# Altium PCB 电眼主板.PcbDoc (part 1 of 5)
Units mm, origin at the board's own origin, x right, y up, seen from the top; angles counter-clockwise.
Board outline 180 x 100 mm, 2 copper layers (Top Layer, Bottom Layer); 210 components, 262 nets, 810 pads, 212 vias.
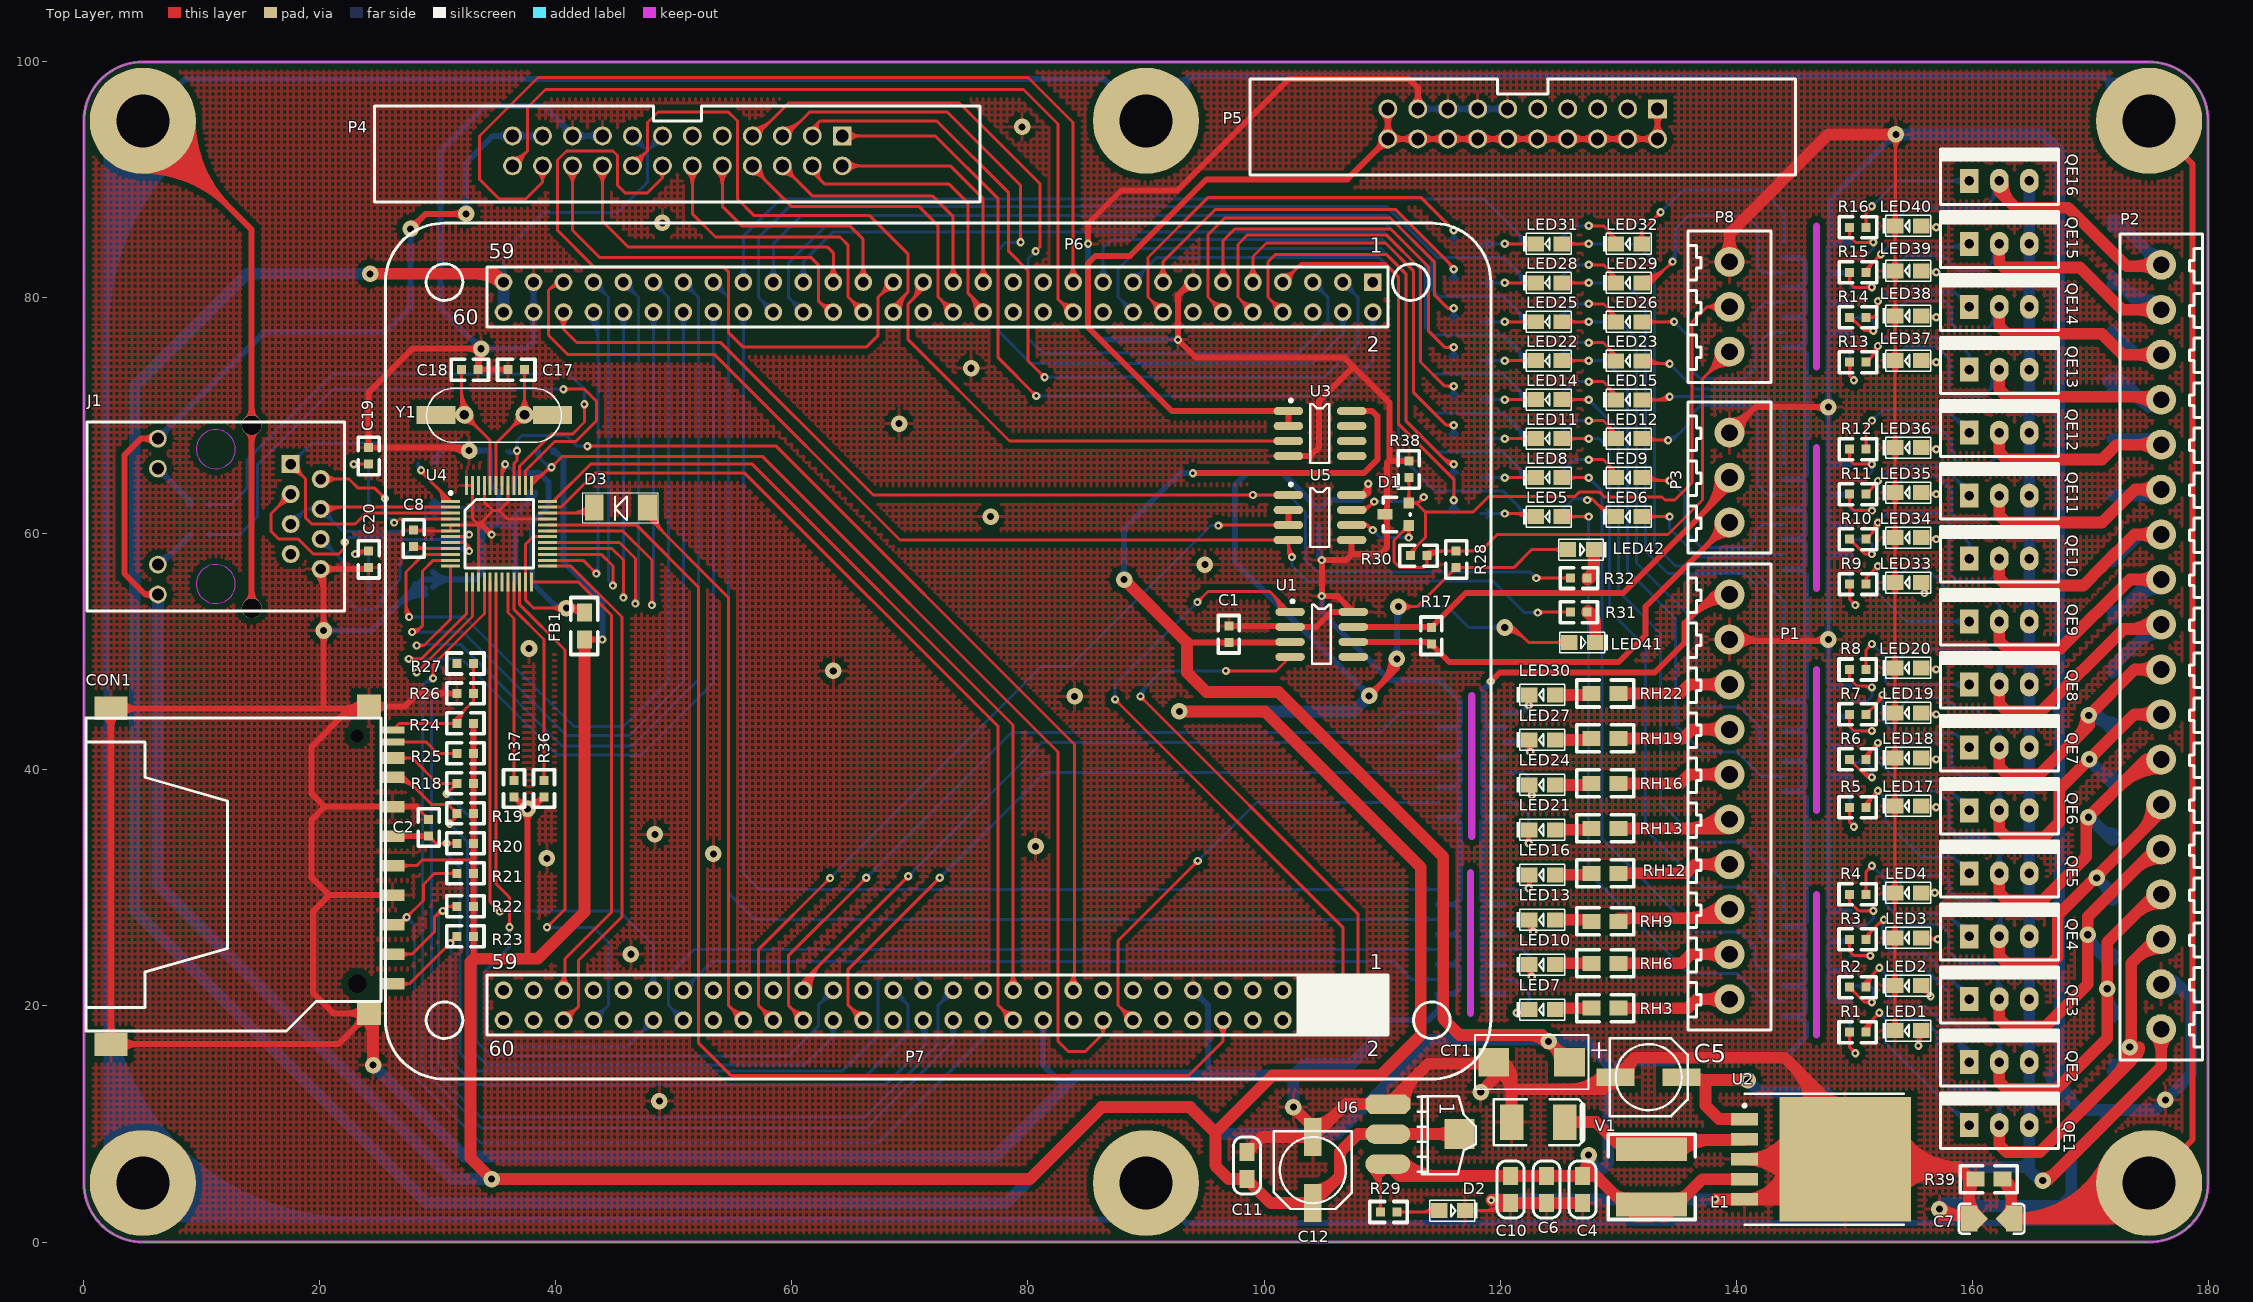
[diagram p0: Top Layer view]
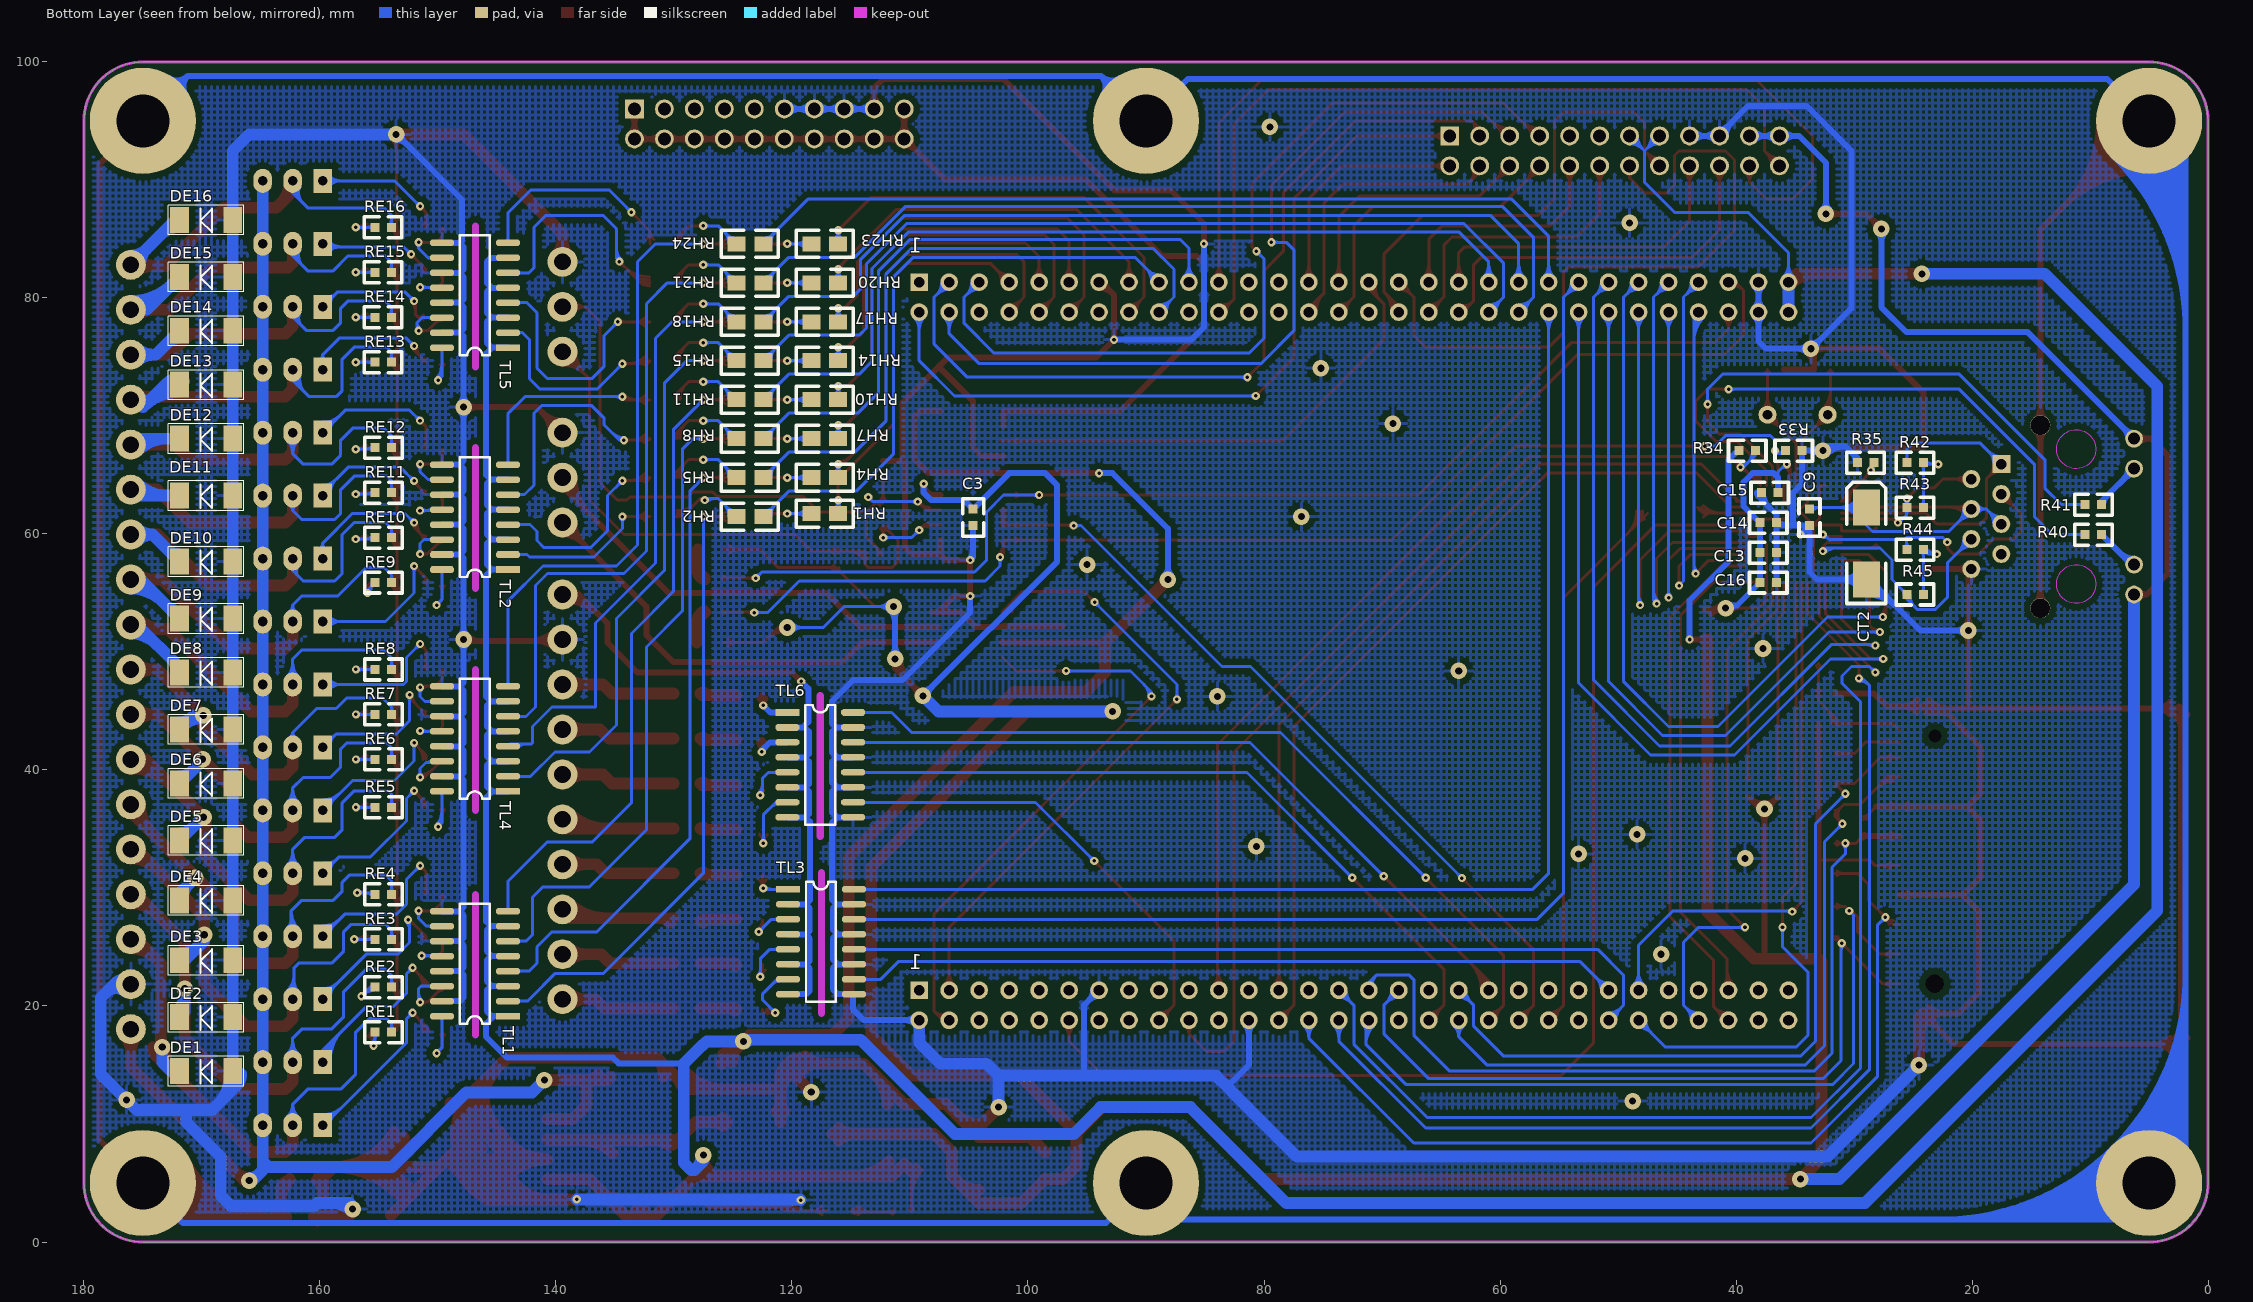
[diagram p1: Bottom Layer view, seen from below]

## Layer stack, top to bottom
Top Layer: signal copper 0.0356
Dielectric: dielectric 0.32, FR-4, Dk 4.8
Bottom Layer: signal copper 0.0356

## Board outline
0,5 ccw(c5,5) 5,0 175,0 ccw(c175,5) 180,5 180,95 ccw(c175,95) 175,100 5,100 ccw(c5,95) 0,95

## Design rules (kind name [scope] priority, off if disabled: settings)
Clearance Clearance_1 [Inpolygon] p1: gap=0.508
Clearance [All] p2: gap=0.229
HoleSize [All] p1: absolutevalues=TRUE maxlimit=5 minlimit=0.025 maxpercent=80.000 minpercent=20.000
MinimumSolderMaskSliver [All] p1: minsoldermaskwidth=0
PolygonConnect [All] p1: connectstyle=Relief reliefconductorwidth=0.254 reliefentries=4 polygonreliefangle="90 Angle"
RoutingVias [All] p1: holewidth=0.6 width=1.4 viastyle="Through Hole" minholewidth=0.3 minwidth=0.7 maxholewidth=1 maxwidth=2
SilkToSilkClearance [All] p1: silktosilkclearance=0.01
SilkscreenOverComponentPads [All] p1: minsilkscreentomaskgap=0
SolderMaskExpansion [All] p1: expansion=0.102
TestPointUsage [All] p1: valid=0 allowmultiple=FALSE
Testpoint [All] p1: side=3 testpointundercomponent=TRUE minsize=1.016 maxsize=2.54 preferedsize=1.524 minholesize=0 maxholesize=1.016 preferedholesize=0.813 testpointgrid=0.025 style=297 order=0123456789
Width [All] p1: maxlimit=1 minlimit=0.254 preferedwidth=0.254
20 further rules are at their usual default settings.

## Components (designator, comment, footprint, x,y, rotation, side; value= is the part's Value field where it differs from the comment)
C1 "电容(贴片)" 0603 97.028,50.8 r90 top
C2 "电容(贴片)" 0603 29.21,35.814 r270 top
C3 "电容(贴片)" 0603 104.648,60.706 r90 bottom
C4 "104" 0805C 127,3.302 r90 top
C5 "电解电容(贴片)" CC6.56.5 132.588,13.97 r180 top
C6 "10uF" 0805C 123.952,5.588 r270 top
C7 "102/2KV" 0805CC 163.322,2.032 r180 top
C8 "电容(贴片)" 0603 27.94,58.928 r90 top
C9 "电容(贴片)" 0603 33.782,60.706 r90 bottom
C10 "104" 0805C 120.904,3.302 r90 top
C11 "104" 0805C 98.552,7.62 r270 top
C12 "电解电容(贴片)" CC6.56.5 104.14,6.096 r90 top
C13 "电容(贴片)" 0603 36.576,58.42 r0 bottom
C14 "电容(贴片)" 0603 36.576,60.96 r0 bottom
C15 "电容(贴片)" 0603 37.846,63.5 r180 bottom
C16 "电容(贴片)" 0603 36.576,55.88 r0 bottom
C17 "贴片电容 22p" 0603 37.338,73.914 r180 top
C18 "贴片电容 22p" 0603 32.004,73.914 r0 top
C19 "电容(贴片)" 0603 24.13,67.31 r270 top
C20 "电容(贴片)" 0603 24.13,57.15 r90 top
CON1 "SD卡座" SDCARD 26.162,24.384 r180 top
CT1 "钽电容" CT7343 122.682,15.24 r180 top
CT2 "钽电容(贴片)" 6032 28.956,62.23 r90 bottom
D1 "PSM712" SOT-23 112.268,60.706 r90 top
D2 "17-215-SURC-S530-A3-TR8" LED-0805 114.808,2.54 r0 top
D3 "二极管(贴片)" D1206 47.752,62.23 r180 top
DE1 "二极管(贴片)" D1206 167.386,14.478 r0 bottom
DE2 "二极管(贴片)" D1206 167.386,19.05 r0 bottom
DE3 "二极管(贴片)" D1206 167.386,23.876 r0 bottom
DE4 "二极管(贴片)" D1206 167.386,28.956 r0 bottom
DE5 "二极管(贴片)" D1206 167.386,34.036 r0 bottom
DE6 "二极管(贴片)" D1206 167.386,38.862 r0 bottom
DE7 "二极管(贴片)" D1206 167.386,43.434 r0 bottom
DE8 "二极管(贴片)" D1206 167.386,48.26 r0 bottom
DE9 "二极管(贴片)" D1206 167.386,52.832 r0 bottom
DE10 "二极管(贴片)" D1206 167.386,57.658 r0 bottom
DE11 "二极管(贴片)" D1206 167.386,63.246 r0 bottom
DE12 "二极管(贴片)" D1206 167.386,68.072 r0 bottom
DE13 "二极管(贴片)" D1206 167.386,72.644 r0 bottom
DE14 "二极管(贴片)" D1206 167.386,77.216 r0 bottom
DE15 "二极管(贴片)" D1206 167.386,81.788 r0 bottom
DE16 "二极管(贴片)" D1206 167.386,86.614 r0 bottom
FB1 "220R 2A" 0805 42.418,53.34 r270 top
J1 "RJ45" HR911105A 11.176,61.468 r90 top
L1 "电感(贴片)" 6045 132.842,7.874 r270 top
LED1 "二极管(贴片发光绿色)" LED-0805 155.702,18.034 r180 top
LED2 "二极管(贴片发光绿色)" LED-0805 155.702,21.844 r180 top
LED3 "二极管(贴片发光绿色)" LED-0805 155.702,25.908 r180 top
LED4 "二极管(贴片发光绿色)" LED-0805 155.702,29.718 r180 top
LED5 "二极管(贴片发光绿色)" LED-0805 125.247,61.595 r180 top
LED6 "二极管(贴片发光绿色)" LED-0805 132.046,61.589 r180 top
LED7 "二极管(贴片发光绿色)" LED-0805 124.714,19.812 r180 top
LED8 "二极管(贴片发光绿色)" LED-0805 125.247,64.897 r180 top
LED9 "二极管(贴片发光绿色)" LED-0805 132.046,64.891 r180 top
LED10 "二极管(贴片发光绿色)" LED-0805 124.714,23.622 r180 top
LED11 "二极管(贴片发光绿色)" LED-0805 125.247,68.199 r180 top
LED12 "二极管(贴片发光绿色)" LED-0805 132.046,68.193 r180 top
LED13 "二极管(贴片发光绿色)" LED-0805 124.714,27.432 r180 top
LED14 "二极管(贴片发光绿色)" LED-0805 125.247,71.501 r180 top
LED15 "二极管(贴片发光绿色)" LED-0805 132.046,71.495 r180 top
LED16 "二极管(贴片发光绿色)" LED-0805 124.714,31.242 r180 top
LED17 "二极管(贴片发光绿色)" LED-0805 155.702,37.084 r180 top
LED18 "二极管(贴片发光绿色)" LED-0805 155.702,41.148 r180 top
LED19 "二极管(贴片发光绿色)" LED-0805 155.702,44.958 r180 top
LED20 "二极管(贴片发光绿色)" LED-0805 155.702,48.768 r180 top
LED21 "二极管(贴片发光绿色)" LED-0805 124.714,35.052 r180 top
LED22 "二极管(贴片发光绿色)" LED-0805 125.247,74.803 r180 top
LED23 "二极管(贴片发光绿色)" LED-0805 132.046,74.797 r180 top
LED24 "二极管(贴片发光绿色)" LED-0805 124.714,38.862 r180 top
LED25 "二极管(贴片发光绿色)" LED-0805 125.247,78.105 r180 top
LED26 "二极管(贴片发光绿色)" LED-0805 132.046,78.099 r180 top
LED27 "二极管(贴片发光绿色)" LED-0805 124.714,42.672 r180 top
LED28 "二极管(贴片发光绿色)" LED-0805 125.247,81.407 r180 top
LED29 "二极管(贴片发光绿色)" LED-0805 132.046,81.401 r180 top
LED30 "二极管(贴片发光绿色)" LED-0805 124.714,46.482 r180 top
LED31 "二极管(贴片发光绿色)" LED-0805 125.247,84.709 r180 top
LED32 "二极管(贴片发光绿色)" LED-0805 132.046,84.703 r180 top
LED33 "二极管(贴片发光绿色)" LED-0805 155.727,56.007 r180 top
LED34 "二极管(贴片发光绿色)" LED-0805 155.727,59.817 r180 top
LED35 "二极管(贴片发光绿色)" LED-0805 155.727,63.627 r180 top
LED36 "二极管(贴片发光绿色)" LED-0805 155.727,67.437 r180 top
LED37 "二极管(贴片发光绿色)" LED-0805 155.727,74.803 r180 top
LED38 "二极管(贴片发光绿色)" LED-0805 155.727,78.613 r180 top
LED39 "二极管(贴片发光绿色)" LED-0805 155.727,82.423 r180 top
LED40 "二极管(贴片发光绿色)" LED-0805 155.727,86.233 r180 top
LED41 "二极管(贴片发光绿色)" LED-0805 125.832,50.673 r0 top
LED42 "二极管(贴片发光绿色)" LED-0805 125.73,58.547 r0 top
P1 "Header 10" CON10 139.446,20.574 r0 top
P2 "Header 18" CON18 176.022,82.804 r180 top
P3 "Header 3" CON3 139.446,60.96 r0 top
P4 "牛角插座" niujiaocha24P 64.262,93.726 r180 top
P5 "牛角插座" niujiaocha20p 133.35,96.012 r180 top
P6 "Header 30X2" HDR2X30 109.22,81.336 r180 top
P7 "Header 30X2" HDR2X30 109.22,21.336 r180 top
P8 "Header 3" CON3 139.446,75.438 r0 top
QE1 "三极管(直插)" TIP127 162.306,9.906 r0 top
QE2 "三极管(直插)" TIP127 162.306,15.24 r0 top
QE3 "三极管(直插)" TIP127 162.306,20.574 r0 top
QE4 "三极管(直插)" TIP127 162.306,25.908 r0 top
QE5 "三极管(直插)" TIP127 162.306,31.242 r0 top
QE6 "三极管(直插)" TIP127 162.306,36.576 r0 top
QE7 "三极管(直插)" TIP127 162.306,41.91 r0 top
QE8 "三极管(直插)" TIP127 162.306,47.244 r0 top
QE9 "三极管(直插)" TIP127 162.306,52.578 r0 top
QE10 "三极管(直插)" TIP127 162.306,57.912 r0 top
QE11 "三极管(直插)" TIP127 162.306,63.246 r0 top
QE12 "三极管(直插)" TIP127 162.306,68.58 r0 top
QE13 "三极管(直插)" TIP127 162.306,73.914 r0 top
QE14 "三极管(直插)" TIP127 162.306,79.248 r0 top
QE15 "三极管(直插)" TIP127 162.306,84.582 r0 top
QE16 "三极管(直插)" TIP127 162.306,89.916 r0 top
R1 "电阻(贴片)" 0603 149.606,17.78 r0 top
R2 "电阻(贴片)" 0603 149.606,21.59 r0 top
R3 "电阻(贴片)" 0603 149.606,25.654 r0 top
R4 "电阻(贴片)" 0603 149.606,29.464 r0 top
R5 "电阻(贴片)" 0603 149.606,36.83 r0 top
R6 "电阻(贴片)" 0603 149.606,40.894 r0 top
R7 "电阻(贴片)" 0603 149.606,44.704 r0 top
R8 "电阻(贴片)" 0603 149.606,48.514 r0 top
R9 "电阻(贴片)" 0603 149.631,55.753 r0 top
R10 "电阻(贴片)" 0603 149.631,59.563 r0 top
R11 "电阻(贴片)" 0603 149.631,63.373 r0 top
R12 "电阻(贴片)" 0603 149.631,67.183 r0 top
R13 "电阻(贴片)" 0603 149.631,74.549 r0 top
R14 "电阻(贴片)" 0603 149.631,78.359 r0 top
R15 "电阻(贴片)" 0603 149.631,82.169 r0 top
R16 "电阻(贴片)" 0603 149.631,85.979 r0 top
R17 "电阻(贴片)" 0603 114.186,52.07 r270 top
R18 "电阻(贴片)" 0603 33.02,38.862 r180 top
R19 "电阻(贴片)" 0603 33.02,36.322 r180 top
R20 "电阻(贴片)" 0603 33.02,33.782 r180 top
R21 "电阻(贴片)" 0603 33.02,31.242 r180 top
R22 "电阻(贴片)" 0603 33.02,28.448 r180 top
R23 "电阻(贴片)" 0603 33.02,25.908 r180 top
R24 "电阻(贴片)" 0603 33.02,43.942 r180 top
R25 "电阻(贴片)" 0603 33.02,41.402 r180 top
R26 "电阻(贴片)" 0603 33.02,46.482 r180 top
R27 "电阻(贴片)" 0603 33.02,49.022 r180 top
R28 "电阻(贴片)" 0603 116.275,58.54 r270 top
R29 "2K" 0603 111.252,2.54 r180 top
R30 "电阻(贴片)" 0603 113.792,58.166 r180 top
R31 "电阻(贴片)" 0603 125.974,53.371 r0 top
R32 "电阻(贴片)" 0603 125.984,56.261 r0 top
R33 "电阻(贴片)" 0603 35.814,67.056 r180 bottom
R34 "电阻(贴片)" 0603 38.354,67.056 r0 bottom
R35 "电阻(贴片)" 0603 29.718,66.04 r180 bottom
R36 "电阻(贴片)" 0603 38.989,37.719 r90 top
R37 "电阻(贴片)" 0603 36.449,37.719 r90 top
R38 "电阻(贴片)" 0603 112.268,64.77 r90 top
R39 "1M" 0805R 160.274,5.334 r0 top
R40 "电阻(贴片)" 0603 10.414,59.944 r180 bottom
R41 "电阻(贴片)" 0603 10.414,62.484 r180 bottom
R42 "电阻(贴片)" 0603 24.13,66.04 r0 bottom
R43 "电阻(贴片)" 0603 24.13,62.23 r0 bottom
R44 "电阻(贴片)" 0603 24.13,58.674 r0 bottom
R45 "电阻(贴片)" 0603 24.13,54.864 r0 bottom
RE1 "电阻(贴片)" 0603 153.924,17.78 r0 bottom
RE2 "电阻(贴片)" 0603 153.924,21.59 r0 bottom
RE3 "电阻(贴片)" 0603 153.924,25.654 r0 bottom
RE4 "电阻(贴片)" 0603 153.924,29.464 r0 bottom
RE5 "电阻(贴片)" 0603 153.924,36.83 r0 bottom
RE6 "电阻(贴片)" 0603 153.924,40.894 r0 bottom
RE7 "电阻(贴片)" 0603 153.924,44.704 r0 bottom
RE8 "电阻(贴片)" 0603 153.924,48.514 r0 bottom
RE9 "电阻(贴片)" 0603 153.924,55.88 r0 bottom
RE10 "电阻(贴片)" 0603 153.924,59.69 r0 bottom
RE11 "电阻(贴片)" 0603 153.924,63.5 r0 bottom
RE12 "电阻(贴片)" 0603 153.924,67.31 r0 bottom
RE13 "电阻(贴片)" 0603 153.949,74.549 r0 bottom
RE14 "电阻(贴片)" 0603 153.949,78.359 r0 bottom
RE15 "电阻(贴片)" 0603 153.949,82.169 r0 bottom
RE16 "电阻(贴片)" 0603 153.949,85.979 r0 bottom
RH1 "电阻(贴片)" 0805 118.364,61.722 r180 bottom
RH2 "电阻(贴片)" 0805 124.714,61.468 r180 bottom
RH3 "电阻(贴片)" 0805 127.762,19.812 r0 top
RH4 "电阻(贴片)" 0805 118.364,64.77 r180 bottom
RH5 "电阻(贴片)" 0805 124.714,64.768 r180 bottom
RH6 "电阻(贴片)" 0805 127.762,23.622 r0 top
RH7 "电阻(贴片)" 0805 118.364,68.072 r180 bottom
RH8 "电阻(贴片)" 0805 124.714,68.072 r180 bottom
RH9 "电阻(贴片)" 0805 127.762,27.178 r0 top
RH10 "电阻(贴片)" 0805 118.364,71.374 r180 bottom
RH11 "电阻(贴片)" 0805 124.714,71.374 r180 bottom
RH12 "电阻(贴片)" 0805 127.762,31.24 r0 top
RH13 "电阻(贴片)" 0805 127.762,35.052 r0 top
RH14 "电阻(贴片)" 0805 118.364,74.676 r180 bottom
RH15 "电阻(贴片)" 0805 124.714,74.676 r180 bottom
RH16 "电阻(贴片)" 0805 127.762,38.862 r0 top
RH17 "电阻(贴片)" 0805 118.364,77.978 r180 bottom
RH18 "电阻(贴片)" 0805 124.714,77.978 r180 bottom
RH19 "电阻(贴片)" 0805 127.762,42.672 r0 top
RH20 "电阻(贴片)" 0805 118.364,81.28 r180 bottom
RH21 "电阻(贴片)" 0805 124.714,81.28 r180 bottom
RH22 "电阻(贴片)" 0805 127.762,46.482 r0 top
RH23 "电阻(贴片)" 0805 118.364,84.582 r180 bottom
RH24 "电阻(贴片)" 0805 124.714,84.582 r180 bottom
TL1 "光耦(贴片)" SOP16 146.812,23.114 r90 bottom
TL2 "光耦(贴片)" SOP16 146.812,60.96 r90 bottom
TL3 "光耦(贴片)" SOP16 117.602,25.908 r270 bottom
TL4 "光耦(贴片)" SOP16 146.812,42.164 r90 bottom
TL5 "光耦(贴片)" SOP16 146.812,79.756 r90 bottom
TL6 "光耦(贴片)" SOP16 117.661,40.894 r270 bottom
U1 "集成电路" sop8 102.248,53.34 r0 top
U2 "LM2596S-5.0" TO-263 140.716,10.414 r270 top
U3 "集成电路" sop8 102.108,70.358 r0 top
U4 "DM9000" mTQFP48 35.306,61.468 r0 top
U5 "集成电路" sop8 102.108,63.246 r0 top
U6 "AMS1117-3.3" AMS1117 110.49,11.684 r270 top
V1 "SK210B" 1812DT 125.476,10.16 r180 top
Y1 "晶体(贴片)" CRYSTAL_SMD 37.338,70.104 r90 top

## Footprints (in the part's own frame and the unit in brackets; to place one, negate y for a bottom-side part, rotate by r counter-clockwise, add the part's x,y. Pads: shape width x height; smd on the part's side, far side on the other; paste and mask are expansions set on the pad)
0603 [mil]
  rect 30x30 smd: 1(0,0) 2(55,0)
  silkscreen extent -35,-35 90,35
0805 [mil]
  rect 60x50 smd: 1(0,-0.06) 2(90,-0.06)
  silkscreen extent -50,-45 140,45
0805C [mil]
  rect 60x50 smd: 1(0,0) 2(90,0)
  silkscreen extent -50,-45 140,45
0805CC [mil]
  rect 56x86.61 smd mask+0: 1(-10,2) 2(141,2)
  rect 56x56 smd rot 45 mask+0: 1(13,2) 2(117,2)
  silkscreen extent -44,-48 175,52
0805R [mil]
  rect 60x50 smd: 1(0,0) 2(90,0)
  silkscreen extent -50,-45 140,45
1812DT [mm]
  rect 2x3 smd: 1(4.496,0) 2(0,0)
  silkscreen extent -1.63,-1.95 5.99,1.97
6032 [mil]
  rect 120x90 smd: 1(0,0) 2(-240,0)
  silkscreen extent -320,-65 85,65
6045 [mm]
  rect 2x6 smd: 1(0,0) 2(4.699,0)
  silkscreen extent -1.27,-3.68 5.97,3.68
AMS1117 [mil]
  oct 65x150 smd: 1(0.03,-0.06)
  oval 65x150 smd: 2(100.03,-0.06) 3(200.03,-0.06)
  rect 100x100 smd: 4(100.03,239.94)
  silkscreen extent -26,100 234,293
CC6.56.5 [mm]
  rect 3.2x1.5 smd: 1(-2.794,0) 2(2.8,0)
  silkscreen extent -3.3,-3.3 3.3,3.3
CON3 [mil]
  round 100 hole 56: 1(0,0) 2(0,150) 3(0,300)
  silkscreen extent -138,-102 138,402
CON10 [mil]
  round 100 hole 56: 1(0,0) 2(0,150) 3(0,300) 4(0,450) 5(0,600) 6(0,750) 7(0,900) 8(0,1050) 9(0,1200) 10(0,1350)
  silkscreen extent -138,-102 138,1452
CON18 [mil]
  round 100 hole 56: 1(0,0) 2(0,150) 3(0,300) 4(0,450) 5(0,600) 6(0,750) 7(0,900) 8(0,1050) 9(0,1200) 10(0,1350) 11(0,1500) 12(0,1650) 13(0,1800) 14(0,1950) 15(0,2100) 16(0,2250) 17(0,2400) 18(0,2550)
  silkscreen extent -138,-102 138,2652
CRYSTAL_SMD [mil]
  rect 60x130 smd: 1(-0.46,-93.11) 2(-0.46,294.61)
  round 60 hole 32: 1(0,0) 2(-0.42,200.43)
  silkscreen extent -93,-123 88,327
CT7343 [mil] "CT7343"
  rect 102x95 smd: 1(-126,0) 2(126,0)
  silkscreen extent -250,-91 190,91
D1206 [mm]
  rect 1.6x2.2 smd: 1(0,0) 2(4.5,0)
  silkscreen extent -0.91,-1.24 5.46,1.27
HDR2X30 [mm] "Connector; Header; 30x2 Position"
  rect 1.5x1.5 hole 0.9: 1(0,0)
  round 1.5 hole 0.9: 2(0,2.54) 3(2.54,0) 4(2.54,2.54) 5(5.08,0) 6(5.08,2.54) 7(7.62,0) 8(7.62,2.54) 9(10.16,0) 10(10.16,2.54) 11(12.7,0) 12(12.7,2.54) 13(15.24,0) 14(15.24,2.54) 15(17.78,0) 16(17.78,2.54) 17(20.32,0) 18(20.32,2.54) 19(22.86,0) 20(22.86,2.54) 21(25.4,0) 22(25.4,2.54) 23(27.94,0) 24(27.94,2.54) 25(30.48,0) 26(30.48,2.54) 27(33.02,0) 28(33.02,2.54) 29(35.56,0) 30(35.56,2.54) 31(38.1,0) 32(38.1,2.54) 33(40.64,0) 34(40.64,2.54) 35(43.18,0) 36(43.18,2.54) 37(45.72,0) 38(45.72,2.54) 39(48.26,0) 40(48.26,2.54) 41(50.8,0) 42(50.8,2.54) 43(53.34,0) 44(53.34,2.54) 45(55.88,0) 46(55.88,2.54) 47(58.42,0) 48(58.42,2.54) 49(60.96,0) 50(60.96,2.54) 51(63.5,0) 52(63.5,2.54) 53(66.04,0) 54(66.04,2.54) 55(68.58,0) 56(68.58,2.54) 57(71.12,0) 58(71.12,2.54) 59(73.66,0) 60(73.66,2.54)
  silkscreen extent -1.27,-1.27 75.06,3.81
HR911105A [mm]
  rect 1.524x1.524 hole 0.889: 1(4.45,-6.35)
  round 1.524 hole 0.889: 2(3.18,-8.89) 3(1.91,-6.35) 4(0.64,-8.89) 5(-0.63,-6.35) 6(-1.9,-8.89) 7(-3.17,-6.35) 8(-4.44,-8.89)
  round 1.5 hole 1.02: 9(6.6,4.9) 10(4.064,4.9) 11(-4.064,4.9) 12(-6.6,4.9)
  round 1.7 hole 1.65: 13(7.75,-3.048) 14(-7.75,-3.048)
  Keep-Out Layer circle w0.051: c5.716,0 r1.65
  Keep-Out Layer circle w0.051: c-5.714,0 r1.65
  silkscreen extent -8,-10.92 8,10.92
LED-0805 [mil]
  rect 55.12x50 smd: 1(0.99,5) 2(88,5)
  silkscreen extent -31,-30 130,40
mTQFP48 [mm]
  rect 1.6x0.254 smd: 1(-4.223,1.3) 2(-4.223,0.8) 3(-4.223,0.3) 4(-4.223,-0.2) 5(-4.223,-0.7) 6(-4.223,-1.2) 7(-4.223,-1.7) 8(-4.223,-2.2) 9(-4.223,-2.7) 10(-4.223,-3.2) 11(-4.223,-3.7) 12(-4.223,-4.2) 25(3.977,-4.2) 26(3.977,-3.7) 27(3.977,-3.2) 28(3.977,-2.7) 29(3.977,-2.2) 30(3.977,-1.7) 31(3.977,-1.2) 32(3.977,-0.7) 33(3.977,-0.2) 34(3.977,0.3) 35(3.977,0.8) 36(3.977,1.3)
  rect 0.254x1.6 smd: 13(-2.873,-5.55) 14(-2.373,-5.55) 15(-1.873,-5.55) 16(-1.373,-5.55) 17(-0.873,-5.55) 18(-0.373,-5.55) 19(0.127,-5.55) 20(0.627,-5.55) 21(1.127,-5.55) 22(1.627,-5.55) 23(2.127,-5.55) 24(2.627,-5.55) 37(2.627,2.65) 38(2.127,2.65) 39(1.627,2.65) 40(1.127,2.65) 41(0.627,2.65) 42(0.127,2.65) 43(-0.373,2.65) 44(-0.873,2.65) 45(-1.373,2.65) 46(-1.873,2.65) 47(-2.373,2.65) 48(-2.873,2.65)
  silkscreen extent -4.35,-4.35 2.78,2.12
niujiaocha20p [mm]
  rect 1.6x1.6 hole 1.1: 1(0,0)
  round 1.6 hole 1.1: 2(0,2.54) 3(2.54,0) 4(2.54,2.54) 5(5.08,0) 6(5.08,2.54) 7(7.62,0) 8(7.62,2.54) 9(10.16,0) 10(10.16,2.54) 11(12.7,0) 12(12.7,2.54) 13(15.24,0) 14(15.24,2.54) 15(17.78,0) 16(17.78,2.54) 17(20.32,0) 18(20.32,2.54) 19(22.86,0) 20(22.86,2.54)
  silkscreen extent -11.68,-2.54 34.54,5.59
niujiaocha24P [mm]
  rect 1.6x1.6 hole 1.1: 1(0,0)
  round 1.6 hole 1.1: 2(0,2.54) 3(2.54,0) 4(2.54,2.54) 5(5.08,0) 6(5.08,2.54) 7(7.62,0) 8(7.62,2.54) 9(10.16,0) 10(10.16,2.54) 11(12.7,0) 12(12.7,2.54) 13(15.24,0) 14(15.24,2.54) 15(17.78,0) 16(17.78,2.54) 17(20.32,0) 18(20.32,2.54) 19(22.86,0) 20(22.86,2.54) 21(25.4,0) 22(25.4,2.54) 23(27.94,0) 24(27.94,2.54)
  silkscreen extent -11.68,-2.54 39.62,5.59
SDCARD [mm]
  rect 2x1 smd: 1(0,0) 2(0,-2.5) 3(0,-5) 4(0,-7.5) 5(0,-10) 6(0,-12.5) 7(0,-15) 8(0,-16.625) 9(0,2.5)
  rect 2x0.6 smd: 10(0,-19) 11(0,-18)
  rect 2x2 smd: 12(2,5) 13(2,-21)
  rect 2.8x2 smd: 14(23.876,-20.828) 15(23.876,7.62)
  round 1.5 hole 1.6: 16(3,2.5)
  round 1 hole 1.1: 17(3,-18.5)
  silkscreen extent 1,-20 26,6.5
sop8 [mm]
  oval 2.5x0.7 smd: 1(-0.037,0.051) 2(-0.037,-1.219) 3(-0.037,-2.489) 4(-0.037,-3.759) 5(5.32,-3.759) 6(5.32,-2.489) 7(5.32,-1.219) 8(5.32,0.051)
  silkscreen extent 0.04,-4.35 3.42,1.08
SOP16 [mil]
  rect 22x80 smd: 1(-156.57,-107.68)
  oct 22x80 smd: 2(-106.57,-107.68) 3(-56.57,-107.68) 4(-6.57,-107.68) 5(43.43,-107.68) 6(93.43,-107.68) 7(143.43,-107.68) 8(193.43,-107.68) 9(193.43,112.32) 10(143.43,112.32) 11(93.43,112.32) 12(43.43,112.32) 13(-6.57,112.32) 14(-56.57,112.32) 15(-106.57,112.32) 16(-156.57,112.32)
  silkscreen extent -182,-48 218,52
SOT-23 [mil]
  rect 36x36 smd: 1(0,0) 2(75,0)
  rect 36x50 smd: 3(38,80)
  silkscreen extent -20,-5 95,85
TIP127 [mil]
  rect 62x80 hole 32: 1(-100,0)
  oval 62x80 hole 32: 2(0,0) 3(100,0)
  silkscreen extent -197,-79 197,107
TO-263 [mil]
  rect 42x90 smd: 1(0,0) 2(66.93,0) 3(133.86,0) 4(200.79,0) 5(267.72,0)
  rect 414x440 smd: 6(133.86,336)
  silkscreen extent -85,-5 352,531

## Part data
C1 C3 C8 C9 C13 C14 C15 C16 C19 C20: library part "CAP_0.1uF X7R 0603", "0603X7R104J160NT(0.1uF)"
C2: library part "CAP_22pF COG 0603", "0603COG220J500NT(22pF)"
C4 C5 C7 C10 C11 C12: library part CAP
C6: library part Pro92D1.TMP_105_9, "片状电容"
C17: library part Cap, "Capacitor 0.1uf"
C18: library part Cap, "Capacitor 10uf"
CON1: library part SD-CARD, "SD/MMC CARD 26mm*25mm"
CT1: library part "CAP POL"
CT2: library part "CAP TAN 100uF/10V/6032", "100uF/10V/6032封装"
D1: library part Component_1
D2: library part LED
D3: library part "DIODE 1N4148/1206", "1N4148/1206"
DE1 DE2 DE3 DE4 DE5 DE6 DE7 DE8 DE9 DE10 DE11 DE12 DE13 DE14 DE15 DE16: library part "DIODE 1N5822/SS34", "1N5822/SS34/SMA 肖特基"
FB1: library part FERRITE, "220R,2.0A,0.05DCR"
J1: library part HR911105
L1: library part Inductor, "Inductor"
LED1 LED2 LED3 LED4 LED5 LED6 LED7 LED8 LED9 LED10 LED11 LED12 LED13 LED14 LED15 LED16 LED17 LED18 LED19 LED20 LED21 LED22 LED23 LED24 LED25 LED26 LED27 LED28 LED29 LED30 LED31 LED32 LED33 LED34 LED35 LED36 LED37 LED38 LED39 LED40 LED41 LED42: library part "LED_GREEN 0805", "LED-0805"
P1: "Header, 10-Pin"
P2: "Header, 18-Pin"
P3 P8: "Header, 3-Pin"
P4: library part "Header 12X2", "Header, 12-Pin, Dual row"
P5: library part "Header 10X2", "Header, 10-Pin, Dual row"
P6 P7: "Header, 30-Pin, Dual row"
QE1 QE2 QE3 QE4 QE5 QE6 QE7 QE8 QE9 QE10 QE11 QE12 QE13 QE14 QE15 QE16: library part TIP127
R1 R2 R3 R4 R5 R6 R7 R8 R9 R10 R11 R12 R13 R14 R15 R16 R18 R19 R20 R21 R22 R23 R24 R25 R33 R34 R35 R36 R37: library part "RES_10K 5% 0603", "RS-03K-103±5%(10KΩ)"
R17 R28 R30 R31 R32 R38: library part "RES_1K  5% 0603", "RS-03K-102±5%(1KΩ)"
R26 R27: library part "RES_0Ω 5% 0603", "RS-03K-000±5%(0Ω)"
R29: library part RESISTOR_Dup1
R39: library part Res2, "Resistor"
R40 R41 R42 R43 R44 R45: library part "RES_10K 5% 0603", "RS-03K-49.9±5%(49.9Ω)"
RE1 RE2 RE3 RE4 RE5 RE6 RE7 RE8 RE9 RE10 RE11 RE12 RE13 RE14 RE15 RE16: library part "RES_5.1K 5% 0805", "RS-05K-512±5%(5.1KΩ 5%)"
RH1 RH2 RH4 RH5 RH7 RH8 RH10 RH11 RH14 RH15 RH17 RH18 RH20 RH21 RH23 RH24: library part "RES_200Ω5% 0805", "RS-05K-201±5%(200Ω)"
RH3 RH6 RH9 RH12 RH13 RH16 RH19 RH22: library part "RES_200Ω5% 0805", "RS-05K-4.7K±5%(4.7KΩ)"
TL1 TL2 TL3 TL4 TL5 TL6: library part "隔离光耦 TLP281-4/SOP16", "TLP281-4/SOP16"
U1: library part TJA1050
U2: library part LM2575T5.0(5), "SIMPLE SWITCHER 1A STEP DOWN VOLTAGE REGULATOR"
U3: library part AD822
U4: library part DM9000A
U5: library part SP485
U6: library part AMS1117
V1: library part DIODE1, "1N5824"
Y1: library part "CRYSTAL 12M HC-49SMD", "HC-49SMD/25.000MHz"

## Free pads (board coordinates)
  round 9 hole 4.5: 0(5,5) 0(5,95) 0(90,5) 0(90,95) 0(175,5) 0(175,95)

## Via types
v1: diameter 0.7, hole 0.3, Top Layer to Bottom Layer, 163 vias
v2: diameter 1.4, hole 0.6, Top Layer to Bottom Layer, 49 vias

## Nets (pads, with @x,y where several pads share a name; then routed paths per layer and width w, separated by ;. In a path a pad name is that pad's centre, name@x,y a point inside that pad or via, vN(x,y) a via of type N, cw(c..) or ccw(c..) an arc to the next point about the centre after c; other vN are vias at no path point)
485_A: D1.1 P8.1 R28.1 R30.1 U5.6 | length 76.2
  Top Layer w0.254: U5.6@107.428,60.757 108.788,60.757 ; U5.6@108.31,60.782 cw(c108.533,60.467) 108.805,60.74 ; U5.6@108.327,60.788 cw(c108.36,59.832) v1@109.037,60.508 ; U5.6@108.457,60.575 cw(c108.709,60.218) v1@109.018,60.527 ; U5.6@108.503,60.619 cw(c108.788,60.394) 108.788,60.757 ; U5.6@108.503,60.895 ccw(c108.788,61.12) 108.788,60.757 ; v1(109.22,60.325) 108.788,60.757 ; D1.1@111.938,60.706 cw(c111.141,60.706) 111.704,60.142 cw(c112.268,59.579) D1.1@112.268,60.376 ; D1.1@112.035,60.473 cw(c111.471,59.909) 112.268,59.909 cw(c113.065,59.909) D1.1@112.501,60.473 ; v1@112.11,59.848 ccw(c111.73,60.228) 112.268,60.228 ccw(c112.806,60.228) v1@112.426,59.848 ; v1(112.268,59.69) D1.1@112.268,60.706 111.02,59.458 111.02,57.636 111.506,57.15 113.538,57.15 113.792,57.404 R30.1@113.792,58.166 ; R30.1@113.612,57.986 cw(c113.179,57.553) 113.792,57.553 cw(c114.405,57.553) 113.972,57.986 cw(c115.309,56.649) 115.309,58.54 ; R30.1@113.612,58.346 cw(c114.082,57.876) R30.1@114.082,58.54 ; 114.696,58.54 ccw(c114.696,57.262) R30.1@113.792,58.166 ; R28.1@116.095,58.361 ccw(c115.661,57.927) 115.661,58.54 ccw(c115.661,59.154) R28.1@116.095,58.72 ; R28.1@116.454,58.361 cw(c116.888,57.927) 116.888,58.54 cw(c116.888,59.154) R28.1@116.454,58.72 ; P8.1@138.303,75.438 cw(c135.544,75.438) 137.495,73.487 cw(c139.446,71.536) P8.1@139.446,74.295 ; P8.1@138.557,75.438 cw(c136.411,75.438) 137.928,73.92 cw(c139.446,72.403) P8.1@139.446,74.549 ; P8.1@138.811,75.438 cw(c137.278,75.438) 138.362,74.354 cw(c139.446,73.27) P8.1@139.446,74.803 ; P8.1@139.446,75.438 137.16,73.152 137.16,62.865 134.239,59.944 119.761,59.944 118.357,58.54 R28.1@116.275,58.54 114.166,58.54 R30.1@113.792,58.166
  Bottom Layer w0.254: v1@109.22,60.102 cw(c109.22,59.564) 109.601,59.944 cw(c109.981,60.325) v1@109.443,60.325 ; v1(109.22,60.325) 109.855,59.69 v1(112.268,59.69) ; v1@112.11,59.532 ccw(c111.73,59.152) 111.73,59.69 ccw(c111.73,60.228) v1@112.11,59.848
485_B: D1.2 P8.2 R30.2 R38.1 U5.7 | length 69.5
  Top Layer w0.254: U5.7@107.428,62.027 108.636,62.027 v1(109.347,62.738) ; U5.7@108.328,61.996 ccw(c108.328,62.664) 108.8,62.191 ; U5.7@108.328,62.25 ccw(c108.328,63.531) v1@109.234,62.625 ; v1@109.124,62.738 cw(c108.586,62.738) 108.966,62.357 cw(c109.347,61.977) v1@109.347,62.515 ; D1.2@112.035,62.844 ccw(c111.471,63.408) 112.268,63.408 ccw(c113.065,63.408) D1.2@112.501,62.844 ; R38.1@112.088,64.59 cw(c111.655,64.157) 112.268,64.157 cw(c112.881,64.157) R38.1@112.448,64.59 ; R38.1@112.268,64.77 D1.2@112.268,62.611 112.903,62.611 ; D1.2@112.538,62.421 cw(c112.903,62.166) 112.903,62.611 ; D1.2@112.538,62.801 ccw(c112.903,63.056) 112.903,62.611 ; 112.575,58.6 ccw(c113.008,58.166) R30.2@112.395,58.166 112.395,58.42 113.665,59.69 113.665,61.849 ; R30.2@112.649,58.166 cw(c113.875,58.166) 113.008,59.033 ; v1@113.315,63.119 cw(c112.777,63.119) 113.157,62.738 cw(c113.538,62.358) v1@113.538,62.896 ; v1(113.538,63.119) 113.03,62.611 112.903,62.611 ; P8.2@138.437,78.71 ccw(c137.541,78.232) 137.541,79.248 ; P8.2@138.437,79.786 cw(c137.541,80.264) 137.541,79.248 ; P8.2@138.662,78.83 ccw(c137.964,78.458) 137.964,79.248 ccw(c137.964,80.038) P8.2@138.662,79.666 ; P8.2@139.446,79.248 137.541,79.248 ; 112.903,62.611 113.665,61.849 ; 113.665,61.849 117.729,61.849 119.044,63.164 126.34,63.164 126.746,63.571 128.397,63.571 128.849,63.119 133.731,63.119 133.985,62.865 134.793,62.865 136.271,64.343 136.271,77.978 137.541,79.248
  Bottom Layer w0.254: v1(109.347,62.738) 113.157,62.738 v1(113.538,63.119) ; v1@109.505,62.58 cw(c109.885,62.2) 109.885,62.738 cw(c109.885,63.276) v1@109.505,62.896
A0: P4.1 P6.2 | length 76.9
  Top Layer w0.254: P4.1@64.262,93.726 72.136,93.726 77.47,88.392 77.47,74.93 v1(80.709,71.691) ; P4.1@64.558,93.43 cw(c65.274,92.714) 65.274,93.726 cw(c65.274,94.738) P4.1@64.558,94.022 ; P4.1@64.738,93.25 cw(c65.887,92.101) 65.887,93.726 cw(c65.887,95.351) P4.1@64.738,94.202 ; v1@80.486,71.691 ccw(c79.947,71.691) 80.328,72.072 ccw(c80.709,72.453) v1@80.709,71.914
  Bottom Layer w0.254: v1(80.709,71.691) 106.236,71.691 109.22,74.676 P6.2@109.22,78.796 ; v1@80.866,71.534 cw(c81.247,71.153) 81.247,71.691 cw(c81.247,72.23) v1@80.866,71.849 ; P6.2@108.779,78.355 cw(c107.716,77.292) 109.22,77.292 cw(c110.724,77.292) P6.2@109.661,78.355 ; P6.2@108.959,78.535 cw(c108.329,77.905) 109.22,77.905 cw(c110.111,77.905) P6.2@109.481,78.535
A1: P4.3 P6.3 | length 78.6
  Top Layer w0.254: P4.3@61.722,93.726 61.722,94.361 62.357,94.996 ; P4.3@61.858,93.82 cw(c62.339,94.151) 61.926,94.565 ; P4.3@62.067,93.964 cw(c62.594,94.327) 62.141,94.78 ; P4.3@62.276,94.108 cw(c62.849,94.503) 62.357,94.996 ; v1@81.184,73.279 ccw(c80.646,73.279) 81.026,73.66 ccw(c81.407,74.04) v1@81.407,73.502 ; v1(81.407,73.279) 80.01,74.676 80.01,82.296 78.359,83.947 78.359,88.9 72.263,94.996 62.357,94.996
  Bottom Layer w0.254: v1(81.407,73.279) 105.156,73.279 107.95,76.073 107.95,80.066 P6.3@106.68,81.336 ; v1@81.565,73.121 cw(c81.945,72.741) 81.945,73.279 cw(c81.945,73.817) v1@81.565,73.437 ; P6.3@106.68,80.713 cw(c106.68,79.209) 107.744,80.272 cw(c108.807,81.336) P6.3@107.303,81.336 ; P6.3@106.68,80.967 cw(c106.68,80.076) 107.31,80.706 cw(c107.94,81.336) P6.3@107.049,81.336
A2: P4.5 P6.4 | length 80.9
  Top Layer w0.254: P4.5@59.182,93.726 59.468,93.726 61.5,95.758 73.152,95.758 79.375,89.535 v1(79.375,84.709) ; P4.5@59.182,93.891 ccw(c59.182,94.98) 59.952,94.21 ; P4.5@59.182,94.145 ccw(c59.182,95.847) 60.386,94.644 ; P4.5@59.182,94.399 ccw(c59.182,96.714) 60.819,95.077 ; P4.5@59.855,93.726 cw(c60.789,93.726) 60.129,94.387 ; v1@79.217,84.867 ccw(c78.837,85.247) 79.375,85.247 ccw(c79.913,85.247) v1@79.533,84.867
  Bottom Layer w0.254: v1@79.217,84.551 ccw(c78.837,84.171) 78.837,84.709 ccw(c78.837,85.247) v1@79.217,84.867 ; v1(79.375,84.709) 78.105,84.709 77.47,84.074 77.47,77.216 80.264,74.422 104.14,74.422 106.68,76.962 P6.4@106.68,78.796 ; P6.4@106.239,78.355 cw(c105.176,77.292) 106.68,77.292 cw(c108.184,77.292) P6.4@107.121,78.355 ; P6.4@106.419,78.535 cw(c105.789,77.905) 106.68,77.905 cw(c107.571,77.905) P6.4@106.941,78.535
CAN_RX: P7.4 U1.4 | length 57.3
  Top Layer w0.254: v1@89.535,46.005 cw(c89.535,45.467) 89.916,45.847 cw(c90.296,46.228) v1@89.758,46.228 ; v1(89.535,46.228) 107.95,27.813 107.95,19.558 ; v1(96.774,48.387) 101.017,48.387 U1.4@102.211,49.581 ; v1@96.932,48.229 cw(c97.312,47.849) 97.312,48.387 cw(c97.312,48.925) v1@96.932,48.545 ; P7.4@106.68,18.796 107.188,18.796 107.95,19.558 ; P7.4@106.726,18.901 ccw(c106.979,19.478) 107.425,19.033 ; P7.4@106.828,19.134 ccw(c107.14,19.843) 107.687,19.295 ; P7.4@106.931,19.366 ccw(c107.3,20.208) 107.95,19.558
  Bottom Layer w0.254: v1@89.504,46.228 cw(c90.349,46.228) 89.751,46.825 ; v1(89.535,46.228) 89.535,46.609 91.313,48.387 v1(96.774,48.387) ; v1@89.758,46.228 cw(c91.216,46.228) 90.185,47.259 ; v1@96.616,48.229 ccw(c96.236,47.849) 96.236,48.387 ccw(c96.236,48.925) v1@96.616,48.545
CAN_TX: P7.3 U1.1 | length 63.6
  Top Layer w0.254: v1@87.376,45.751 cw(c87.376,45.213) 87.757,45.593 cw(c88.137,45.974) v1@87.599,45.974 ; v1(87.376,45.974) 106.68,26.67 P7.3@106.68,21.336 ; v1(94.361,54.229) 95.25,55.118 100.484,55.118 U1.1@102.211,53.391 ; v1@94.361,54.452 ccw(c94.361,54.99) 94.742,54.61 ccw(c95.122,54.229) v1@94.584,54.229 ; 100.727,54.874 cw(c99.244,53.391) U1.1@101.342,53.391 ; 101.161,54.441 cw(c100.111,53.391) U1.1@101.596,53.391 ; 101.595,54.007 cw(c100.978,53.391) U1.1@101.85,53.391 ; U1.1@102.028,53.573 cw(c101.845,53.391) U1.1@102.104,53.391 ; P7.3@106.239,21.777 ccw(c105.176,22.84) 106.68,22.84 ccw(c108.184,22.84) P7.3@107.121,21.777 ; P7.3@106.419,21.597 ccw(c105.789,22.227) 106.68,22.227 ccw(c107.571,22.227) P7.3@106.941,21.597
  Bottom Layer w0.254: v1@87.218,46.132 ccw(c86.838,46.512) 87.376,46.512 ccw(c87.914,46.512) v1@87.534,46.132 ; v1(87.376,45.974) 87.376,47.244 v1(94.361,54.229) ; v1@94.138,54.229 cw(c93.6,54.229) 93.98,53.848 cw(c94.361,53.468) v1@94.361,54.006
CH0: P4.2 P6.27 | length 28.1
  Top Layer w0.254: P4.2@64.262,91.186 73.406,91.186 76.2,88.392 P6.27@76.2,81.336 ; P4.2@64.558,90.89 cw(c65.274,90.174) 65.274,91.186 cw(c65.274,92.198) P4.2@64.558,91.482 ; P4.2@64.738,90.71 cw(c65.887,89.561) 65.887,91.186 cw(c65.887,92.811) P4.2@64.738,91.662 ; P6.27@75.759,81.777 ccw(c74.696,82.84) 76.2,82.84 ccw(c77.704,82.84) P6.27@76.641,81.777 ; P6.27@75.939,81.597 ccw(c75.309,82.227) 76.2,82.227 ccw(c77.091,82.227) P6.27@76.461,81.597
CH1: P4.4 P6.28 | length 31.6
  Top Layer w0.254: P4.4@61.722,90.513 cw(c61.722,90.115) 62.004,90.396 ; P4.4@61.722,90.678 62.738,89.662 73.279,89.662 74.93,88.011 74.93,80.391 76.2,79.121 P6.28@76.2,78.796 ; P4.4@61.87,91.113 ccw(c62.412,90.844) 61.984,90.416 ; P4.4@62.097,91 ccw(c62.746,90.678) 62.234,90.166 ; P4.4@62.325,90.887 ccw(c63.08,90.512) 62.484,89.916 ; 74.907,80.414 cw(c73.288,78.796) P6.28@75.577,78.796 ; 75.34,79.981 cw(c74.156,78.796) P6.28@75.831,78.796 ; 75.691,79.63 ccw(c76.2,80.138) P6.28@76.2,79.419 ; 75.774,79.547 cw(c75.023,78.796) P6.28@76.085,78.796
CH2: P4.6 P6.29 | length 29.7
  Top Layer w0.254: P4.6@59.182,90.513 cw(c59.182,88.888) 60.331,90.037 cw(c61.48,91.186) P4.6@59.855,91.186 ; P4.6@59.182,90.767 cw(c59.182,89.755) 59.897,90.471 cw(c60.613,91.186) P4.6@59.601,91.186 ; P4.6@59.182,91.186 61.722,88.646 71.882,88.646 73.66,86.868 P6.29@73.66,81.336 ; P6.29@73.219,81.777 ccw(c72.156,82.84) 73.66,82.84 ccw(c75.164,82.84) P6.29@74.101,81.777 ; P6.29@73.399,81.597 ccw(c72.769,82.227) 73.66,82.227 ccw(c74.551,82.227) P6.29@73.921,81.597
CH3: P4.8 P6.30 | length 33.1
  Top Layer w0.254: P4.8@56.642,90.513 cw(c56.642,89.195) 57.574,90.127 ; P4.8@56.642,91.186 56.642,91.059 59.944,87.757 70.739,87.757 72.39,86.106 72.39,80.066 P6.30@73.66,78.796 ; P4.8@57.061,91.186 ccw(c58.379,91.186) 57.447,90.254 ; P4.8@57.315,91.186 ccw(c59.246,91.186) 57.881,89.82 ; P6.30@73.037,78.796 ccw(c71.533,78.796) 72.596,79.86 ccw(c73.66,80.923) P6.30@73.66,79.419 ; P6.30@73.291,78.796 ccw(c72.4,78.796) 73.03,79.426 ccw(c73.66,80.056) P6.30@73.66,79.165
CH4: P4.10 P6.35 | length 28.1
  Top Layer w0.254: P4.10@53.626,90.71 cw(c52.477,89.561) 54.102,89.561 cw(c55.727,89.561) P4.10@54.578,90.71 ; P4.10@53.806,90.89 cw(c53.09,90.174) 54.102,90.174 cw(c55.114,90.174) P4.10@54.398,90.89 ; P4.10@54.102,91.186 54.102,87.757 55.753,86.106 64.897,86.106 66.04,84.963 P6.35@66.04,81.336 ; P6.35@65.599,81.777 ccw(c64.536,82.84) 66.04,82.84 ccw(c67.544,82.84) P6.35@66.481,81.777 ; P6.35@65.779,81.597 ccw(c65.149,82.227) 66.04,82.227 ccw(c66.931,82.227) P6.35@66.301,81.597
CH5: P4.12 P6.36 | length 31.8
  Top Layer w0.254: P4.12@51.086,90.71 cw(c49.937,89.561) 51.562,89.561 cw(c53.187,89.561) P4.12@52.038,90.71 ; P4.12@51.266,90.89 cw(c50.55,90.174) 51.562,90.174 cw(c52.574,90.174) P4.12@51.858,90.89 ; P4.12@51.562,90.527 51.562,87.122 53.521,85.163 64.062,85.163 64.77,84.455 64.77,80.066 P6.36@66.04,78.796 ; P6.36@65.417,78.796 ccw(c63.913,78.796) 64.976,79.86 ccw(c66.04,80.923) P6.36@66.04,79.419 ; P6.36@65.671,78.796 ccw(c64.78,78.796) 65.41,79.426 ccw(c66.04,80.056) P6.36@66.04,79.165
CH6: P4.14 P6.33 | length 64.2
  Top Layer w0.254: P4.14@48.76,90.566 cw(c48.592,90.17) 49.022,90.17 ; P4.14@49.022,91.186 49.022,90.17 ; P4.14@49.284,90.566 ccw(c49.452,90.17) 49.022,90.17 ; P6.33@67.957,81.336 cw(c66.453,81.336) 67.516,80.272 cw(c68.58,79.209) P6.33@68.58,80.713 ; P6.33@68.211,81.336 cw(c67.32,81.336) 67.95,80.706 cw(c68.58,80.076) P6.33@68.58,80.967 ; P6.33@68.58,81.336 67.31,80.066 67.31,76.835 66.294,75.819 55.88,75.819 54.61,77.089 54.61,82.225 54.229,82.606 43.251,82.606 40.132,85.725 40.132,91.694 40.894,92.456 44.831,92.456 45.212,92.075 45.212,89.535 45.847,88.9 47.752,88.9 49.022,90.17
CH7: P4.16 P6.34 | length 49.7
  Top Layer w0.254: P4.16@46.482,91.186 47.752,92.456 47.752,94.854 48.656,95.758 54.61,95.758 55.388,94.98 55.388,88.376 56.769,86.995 66.548,86.995 69.85,83.693 69.85,80.518 ; P4.16@46.482,91.605 ccw(c46.482,92.617) 47.197,91.901 ccw(c47.913,91.186) P4.16@46.901,91.186 ; P4.16@46.482,91.859 ccw(c46.482,93.484) 47.631,92.335 ccw(c48.78,91.186) P4.16@47.155,91.186 ; P6.34@68.58,78.796 68.58,79.248 69.85,80.518 ; P6.34@68.58,79.419 ccw(c68.58,79.832) 68.872,79.54 ; P6.34@68.695,78.802 cw(c69.89,78.865) 69.044,79.712 ; P6.34@68.948,78.816 cw(c70.656,78.906) 69.447,80.115 ; P6.34@69.202,78.829 cw(c71.421,78.946) 69.85,80.518
CH8: P4.18 P6.37 | length 35.6
  Top Layer w0.254: P4.18@43.466,90.71 cw(c42.317,89.561) 43.942,89.561 cw(c45.567,89.561) P4.18@44.418,90.71 ; P4.18@43.646,90.89 cw(c42.93,90.174) 43.942,90.174 cw(c44.954,90.174) P4.18@44.238,90.89 ; P4.18@43.942,91.059 43.942,86.487 46.101,84.328 62.992,84.328 63.5,83.82 P6.37@63.5,81.336 ; P6.37@63.059,81.777 ccw(c61.996,82.84) 63.5,82.84 ccw(c65.004,82.84) P6.37@63.941,81.777 ; P6.37@63.239,81.597 ccw(c62.609,82.227) 63.5,82.227 ccw(c64.391,82.227) P6.37@63.761,81.597
CH9: P4.20 P6.38 | length 38.7
  Top Layer w0.254: P4.20@40.926,90.71 cw(c39.777,89.561) 41.402,89.561 cw(c43.027,89.561) P4.20@41.878,90.71 ; P4.20@41.106,90.89 cw(c40.39,90.174) 41.402,90.174 cw(c42.414,90.174) P4.20@41.698,90.89 ; P4.20@41.402,91.186 41.402,85.725 43.688,83.439 61.595,83.439 62.23,82.804 62.23,79.756 63.19,78.796 P6.38@63.5,78.796 ; 62.385,79.601 ccw(c63.016,80.232) P6.38@63.301,79.386 ; 62.656,79.33 cw(c62.121,78.796) P6.38@62.877,78.796 ; 62.675,79.311 ccw(c63.162,79.799) P6.38@63.382,79.146
CH10: P4.22 P6.21 | length 86.1
  Top Layer w0.254: P4.22@38.443,90.66 cw(c37.749,89.789) 38.862,89.789 ; P4.22@38.601,90.858 cw(c38.169,90.316) 38.862,90.316 cw(c39.555,90.316) P4.22@39.123,90.858 ; P4.22@38.862,91.186 38.862,89.789 ; P4.22@39.281,90.66 ccw(c39.975,89.789) 38.862,89.789 ; P6.21@83.379,81.777 ccw(c82.316,82.84) 83.82,82.84 ccw(c85.324,82.84) P6.21@84.261,81.777 ; P6.21@83.559,81.597 ccw(c82.929,82.227) 83.82,82.227 ccw(c84.711,82.227) P6.21@84.081,81.597 ; P6.21@83.82,81.336 83.82,94.869 80.01,98.679 38.481,98.679 33.528,93.726 33.528,90.043 35.179,88.392 37.465,88.392 38.862,89.789
CH11: P4.24 P6.22 | length 75.9
  Top Layer w0.254: P4.24@36.322,91.186 37.592,92.456 37.592,96.139 39.116,97.663 79.629,97.663 82.55,94.742 82.55,79.883 83.637,78.796 P6.22@83.82,78.796 ; P4.24@36.322,91.605 ccw(c36.322,92.617) 37.037,91.901 ccw(c37.753,91.186) P4.24@36.741,91.186 ; P4.24@36.322,91.859 ccw(c36.322,93.484) 37.471,92.335 ccw(c38.62,91.186) P4.24@36.995,91.186 ; 82.642,79.791 ccw(c83.577,80.727) P6.22@83.742,79.414 ; 82.886,79.547 cw(c82.135,78.796) P6.22@83.197,78.796 ; 83.008,79.425 ccw(c83.659,80.075) P6.22@83.774,79.162
CH12: P6.23
CH13: P6.24
DAC_OUT1: P6.31 U3.3 | length 46
  Top Layer w0.254: 70.132,79.784 ccw(c69.095,80.821) P6.31@70.516,81.182 ; 70.448,80.1 ccw(c69.599,80.949) P6.31@70.762,81.245 ; 70.763,80.415 ccw(c70.102,81.077) P6.31@71.009,81.308 ; P6.31@71.12,81.336 71.12,80.772 69.85,79.502 69.85,76.454 78.435,67.869 U3.3@102.362,67.869 ; U3.3@101.013,67.711 ccw(c100.633,67.33) 100.633,67.869 ccw(c100.633,68.407) U3.3@101.013,68.026
DAC_OUT2: P6.32
DM9000_INT: D3.1 P7.44 | length 55.6
  Top Layer w0.254: D3.1@47.498,61.722 54.61,54.61 54.61,20.066 P7.44@55.88,18.796 ; D3.1@47.752,61.257 cw(c47.752,60.748) 48.112,61.108 ; D3.1@47.917,61.93 ccw(c49.431,61.93) 48.36,60.86 ; D3.1@48.171,61.93 ccw(c50.298,61.93) 48.794,60.426 ; D3.1@48.425,61.93 ccw(c51.165,61.93) 49.228,59.992 ; P7.44@55.257,18.796 ccw(c53.753,18.796) 54.816,19.86 ccw(c55.88,20.923) P7.44@55.88,19.419 ; P7.44@55.511,18.796 ccw(c54.62,18.796) 55.25,19.426 ccw(c55.88,20.056) P7.44@55.88,19.165
DM9000_RST: P7.21 R33.1 U4.40 | length 92.9
  Top Layer w0.254: U4.40@36.433,64.118 36.433,65.944 36.703,66.214 v1(36.703,67.056) ; v1@36.545,66.898 cw(c36.165,66.518) 36.703,66.518 cw(c37.241,66.518) v1@36.861,66.898 ; v1(42.672,67.437) 58.674,67.437 83.947,42.164 83.947,21.463 P7.21@83.82,21.336 ; v1@42.83,67.279 cw(c43.21,66.899) 43.21,67.437 cw(c43.21,67.975) v1@42.83,67.595 ; P7.21@83.379,21.777 ccw(c82.009,23.147) 83.947,23.147 ; P7.21@83.559,21.597 ccw(c82.623,22.533) 83.947,22.533 ccw(c85.017,22.533) P7.21@84.261,21.777
  Bottom Layer w0.254: R33.1@36.062,67.112 ccw(c36.449,67.199) 36.449,66.802 ; R33.1@36.131,66.802 cw(c36.131,67.127) R33.1@35.814,67.056 R33.1@36.068,66.802 ; 36.406,66.802 ccw(c36.406,67.142) v1@36.733,67.047 ; v1@36.489,67.118 cw(c36.068,67.24) R33.1@36.068,66.802 ; v1@36.545,67.214 ccw(c36.165,67.594) 36.703,67.594 ccw(c37.241,67.594) v1@36.861,67.214 ; v1@42.514,67.279 ccw(c42.134,66.899) 42.134,67.437 ccw(c42.134,67.975) v1@42.514,67.595 ; v1(42.672,67.437) 41.783,67.437 40.894,68.326 37.084,68.326 36.703,67.945 v1(36.703,67.056) 36.449,66.802 ; R33.1@36.068,66.802 36.449,66.802
EN: P4.7 P6.5 | length 82.2
  Top Layer w0.254: P4.7@56.642,93.726 56.928,93.726 59.722,96.52 74.168,96.52 81.026,89.662 81.026,84.328 v1(80.645,83.947) ; P4.7@56.642,93.891 ccw(c56.642,94.98) 57.412,94.21 ; P4.7@56.642,94.145 ccw(c56.642,95.847) 57.846,94.644 ; P4.7@56.642,94.399 ccw(c56.642,96.714) 58.279,95.077 ; P4.7@57.315,93.726 cw(c58.249,93.726) 57.589,94.387
  Bottom Layer w0.254: v1@80.422,83.947 cw(c79.884,83.947) 80.264,83.566 cw(c80.645,83.186) v1@80.645,83.724 ; v1(80.645,83.947) 80.01,83.312 80.01,76.581 81.28,75.311 102.87,75.311 105.41,77.851 105.41,80.066 P6.5@104.14,81.336 ; P6.5@104.14,80.713 cw(c104.14,79.209) 105.204,80.272 cw(c106.267,81.336) P6.5@104.763,81.336 ; P6.5@104.14,80.967 cw(c104.14,80.076) 104.77,80.706 cw(c105.4,81.336) P6.5@104.509,81.336
EXT_IN_CH0: P1.8 RH22.2 | length 12.6
  Top Layer w1: RH22.2@130.05,46.482 135.255,46.482 136.017,47.244 P1.8@139.446,47.244 ; P1.8@138.902,46.7 ccw(c137.587,45.385) 137.587,47.244 ccw(c137.587,49.103) P1.8@138.902,47.788
EXT_IN_CH1: P1.7 RH19.2 | length 12.6
  Top Layer w1: RH19.2@130.05,42.672 135.509,42.672 136.271,43.434 P1.7@139.446,43.434 ; P1.7@138.902,42.89 ccw(c137.587,41.575) 137.587,43.434 ccw(c137.587,45.293) P1.7@138.902,43.978
EXT_IN_CH2: P1.6 RH16.2 | length 12.6
  Top Layer w1: RH16.2@130.05,38.862 135.255,38.862 136.017,39.624 P1.6@139.446,39.624 ; P1.6@138.902,39.08 ccw(c137.587,37.765) 137.587,39.624 ccw(c137.587,41.483) P1.6@138.902,40.168
EXT_IN_CH3: P1.5 RH13.2 | length 14.5
  Top Layer w1: RH13.2@130.048,35.05 139.444,35.05 P1.5@139.446,35.052 ; 135.744,35.05 ccw(c135.744,39.516) P1.5@138.902,36.358 ; 138.158,35.05 ccw(c138.158,37.102) P1.5@139.609,35.651
EXT_IN_CH4: P1.4 RH12.2 | length 12.6
  Top Layer w1: RH12.2@130.05,31.242 135.763,31.242 136.525,32.004 P1.4@139.446,32.004 ; P1.4@138.902,31.46 ccw(c137.587,30.145) 137.587,32.004 ccw(c137.587,33.863) P1.4@138.902,32.548
EXT_IN_CH5: P1.3 RH9.2 | length 15.4
  Top Layer w1: RH9.2@130.05,27.432 P1.3@139.446,27.432 ; RH9.2@130.27,27.081 cw(c131.118,26.233) 131.118,27.432 ; 135.747,27.432 ccw(c135.747,31.893) P1.3@138.902,28.738 ; 138.162,27.432 ccw(c138.162,29.478) P1.3@139.609,28.031
EXT_IN_CH6: P1.2 RH6.2 | length 12.6
  Top Layer w1: RH6.2@130.05,23.622 135.382,23.622 136.144,24.384 P1.2@139.446,24.384 ; P1.2@138.902,23.84 ccw(c137.587,22.525) 137.587,24.384 ccw(c137.587,26.243) P1.2@138.902,24.928
EXT_IN_CH7: P1.1 RH3.2 | length 12.6
  Top Layer w1: RH3.2@130.048,19.81 135.89,19.81 136.654,20.574 P1.1@139.446,20.574 ; P1.1@138.902,20.03 ccw(c137.587,18.715) 137.587,20.574 ccw(c137.587,22.433) P1.1@138.902,21.118 ; P1.1@139.444,19.81 P1.1@139.446,19.812
EXT_OUT_CH0: DE1.2 P2.16 QE1.2 RE1.1 | length 61
  Top Layer w1: QE1.2@162.306,9.906 162.306,8.255 162.941,7.62 165.735,7.62 173.482,15.367 173.482,23.622 175.514,25.654 P2.16@176.022,25.654 ; 172.116,14.001 ccw(c169.606,16.51) v2@173.155,16.51 ; v2@173.214,16.369 cw(c172.566,15.721) 173.482,15.721 ; v2@173.214,16.651 ccw(c172.566,17.299) 173.482,17.299 ; 173.823,15.708 ccw(c173.02,16.51) 174.155,16.51 ; 173.84,23.98 cw(c176.022,21.799) P2.16@176.022,24.884
  Bottom Layer w0.254: RE1.1@153.744,17.96 ccw(c153.311,18.393) 153.924,18.393 ccw(c154.537,18.393) RE1.1@154.104,17.96 ; RE1.1@153.924,17.78 153.924,18.542 154.305,18.923 155.829,18.923 156.972,17.78 156.972,14.224 158.242,12.954 161.036,12.954 162.306,11.684 ; QE1.2@161.849,10.611 ccw(c160.819,11.684) 162.306,11.684 ; QE1.2@162.025,10.428 ccw(c161.391,11.088) 162.306,11.088 ccw(c163.221,11.088) QE1.2@162.587,10.428 ; QE1.2@162.306,9.906 162.306,11.684 ; QE1.2@162.763,10.611 cw(c163.793,11.684) 162.306,11.684
  Bottom Layer w1: DE1.2@171.886,14.478 172.593,14.478 173.355,15.24 ; DE1.2@172.027,15.043 ccw(c172.558,16.037) 173.355,15.24 ; v2(173.355,16.51) 173.355,15.24
EXT_OUT_CH1: DE2.2 P2.15 QE2.2 RE2.1 | length 54.3
  Top Layer w1: QE2.2@162.306,15.24 162.306,13.589 162.941,12.954 167.132,12.954 171.45,17.272 171.45,19.05 171.45,25.4 175.514,29.464 P2.15@176.022,29.464 ; 173.84,27.79 cw(c176.022,25.609) P2.15@176.022,28.694
  Bottom Layer w0.254: RE2.1@153.744,21.77 ccw(c153.311,22.203) 153.924,22.203 ccw(c154.537,22.203) RE2.1@154.104,21.77 ; RE2.1@153.924,21.59 153.924,22.606 154.432,23.114 156.083,23.114 157.988,21.209 157.988,19.082 159.036,18.034 161.544,18.034 162.306,17.272 QE2.2@162.306,15.24 ; QE2.2@161.839,15.936 ccw(c160.712,17.063) 162.306,17.063 ccw(c163.9,17.063) QE2.2@162.773,15.936 ; QE2.2@162.019,15.756 ccw(c161.325,16.45) 162.306,16.45 ccw(c163.287,16.45) QE2.2@162.593,15.756
  Bottom Layer w1: v2@171.45,21.127 ccw(c173.663,21.127) DE2.2@172.098,19.562 ; v2(171.45,21.463) 171.45,19.486 DE2.2@171.886,19.05
EXT_OUT_CH2: DE3.2 P2.14 QE3.2 RE3.1 | length 53.1
  Top Layer w1: QE3.2@162.306,20.574 162.306,18.923 162.941,18.288 166.243,18.288 169.798,21.843 169.798,27.558 175.514,33.274 P2.14@176.022,33.274 ; 173.84,31.6 cw(c176.022,29.419) P2.14@176.022,32.504
  Bottom Layer w0.254: RE3.1@153.744,25.834 ccw(c153.311,26.267) 153.924,26.267 ccw(c154.537,26.267) RE3.1@154.104,25.834 ; RE3.1@153.924,25.654 153.924,26.416 154.432,26.924 157.353,26.924 157.988,26.289 157.988,24.638 159.004,23.622 161.798,23.622 162.179,23.241 162.179,20.701 QE3.2@162.306,20.574 ; QE3.2@161.839,21.27 ccw(c161.018,22.09) 162.179,22.09 ccw(c163.594,22.09) QE3.2@162.593,21.09 ; 162.179,22.704 ccw(c164.207,22.704) QE3.2@162.773,21.27
  Bottom Layer w1: v2(169.799,26.035) v2(169.799,26.035) 169.798,25.527 171.449,23.876 DE3.2@171.886,23.876 ; v2@169.999,26.035 ccw(c171.711,26.035) 170.5,24.825 ; 170.167,25.158 ccw(c171.816,26.808) DE3.2@171.878,24.476
EXT_OUT_CH3: DE4.2 P2.13 QE4.2 RE4.1 | length 49.5
  Top Layer w1: QE4.2@162.306,25.908 162.306,24.257 162.941,23.622 166.719,23.622 167.259,24.162 167.259,27.686 176.022,36.449 P2.13@176.022,37.084 ; 170.003,30.43 cw(c170.561,29.872) v2@170.561,30.661 ; v2@170.761,30.861 cw(c171.55,30.861) 170.992,31.419 ; 174.259,34.686 ccw(c171.86,37.084) P2.13@175.252,37.084
  Bottom Layer w0.254: RE4.1@153.744,29.644 ccw(c153.311,30.077) 153.924,30.077 ccw(c154.537,30.077) RE4.1@154.104,29.644 ; RE4.1@153.924,29.464 153.924,30.607 154.432,31.115 157.48,31.115 158.115,30.48 158.115,29.718 158.877,28.956 161.544,28.956 162.433,28.067 162.433,26.035 QE4.2@162.306,25.908 ; QE4.2@161.839,26.604 ccw(c160.405,28.038) 162.433,28.038 ; QE4.2@162.019,26.424 ccw(c161.018,27.424) 162.433,27.424 ccw(c163.594,27.424) QE4.2@162.773,26.604
  Bottom Layer w1: v2(170.561,30.861) 171.886,29.536 DE4.2@171.886,28.956 ; 171.176,30.246 cw(c170.186,29.256) DE4.2@171.586,29.256